# EAGLE board RGB_Fan_Controller_Rev_D (EAGLE 5.07)
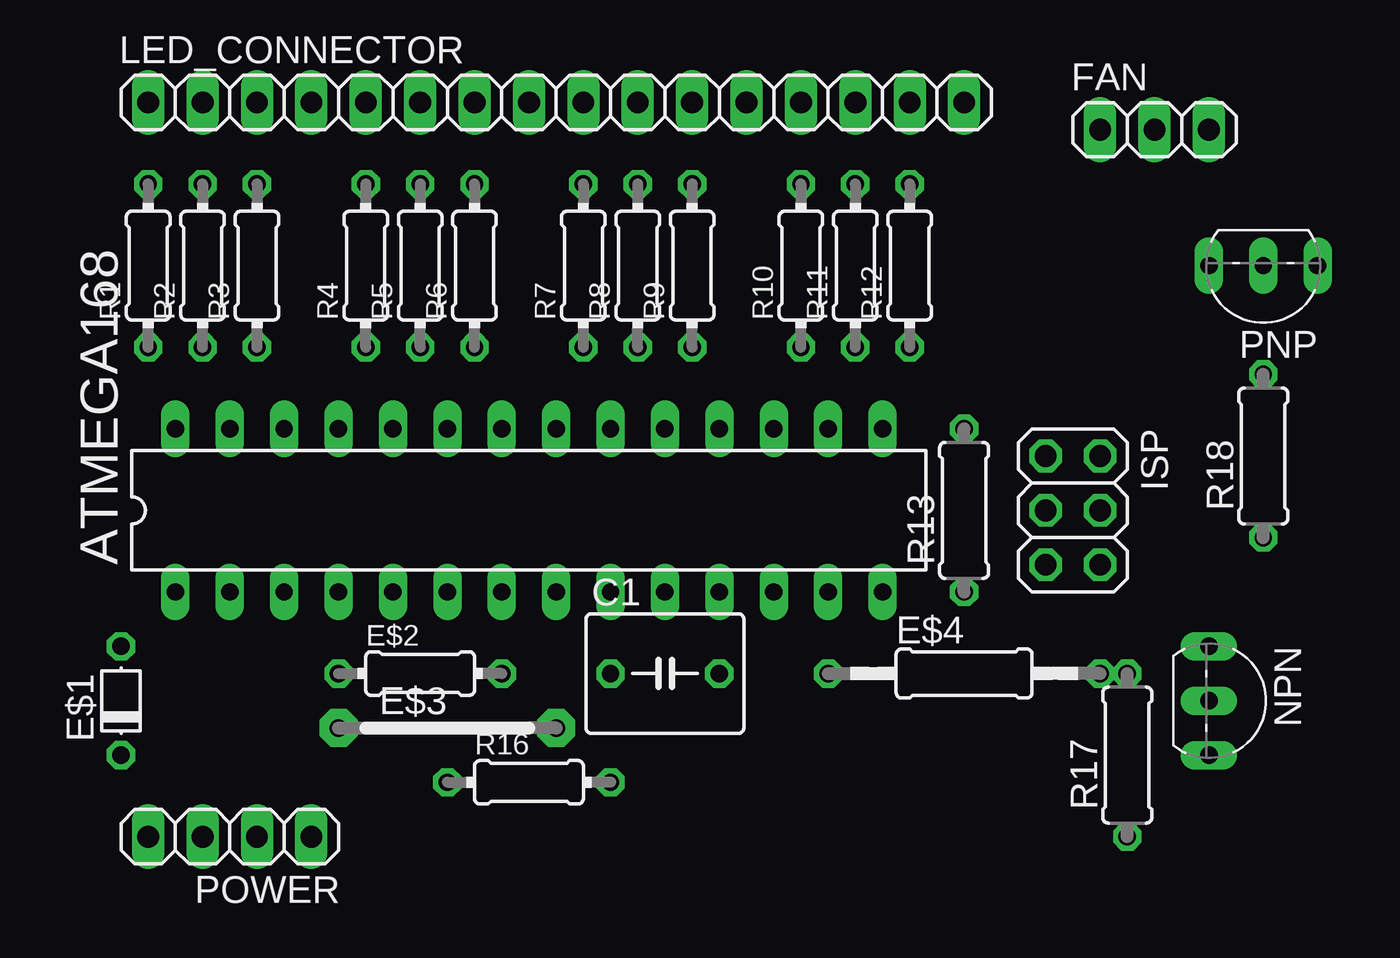
[diagram p0: board, top side]
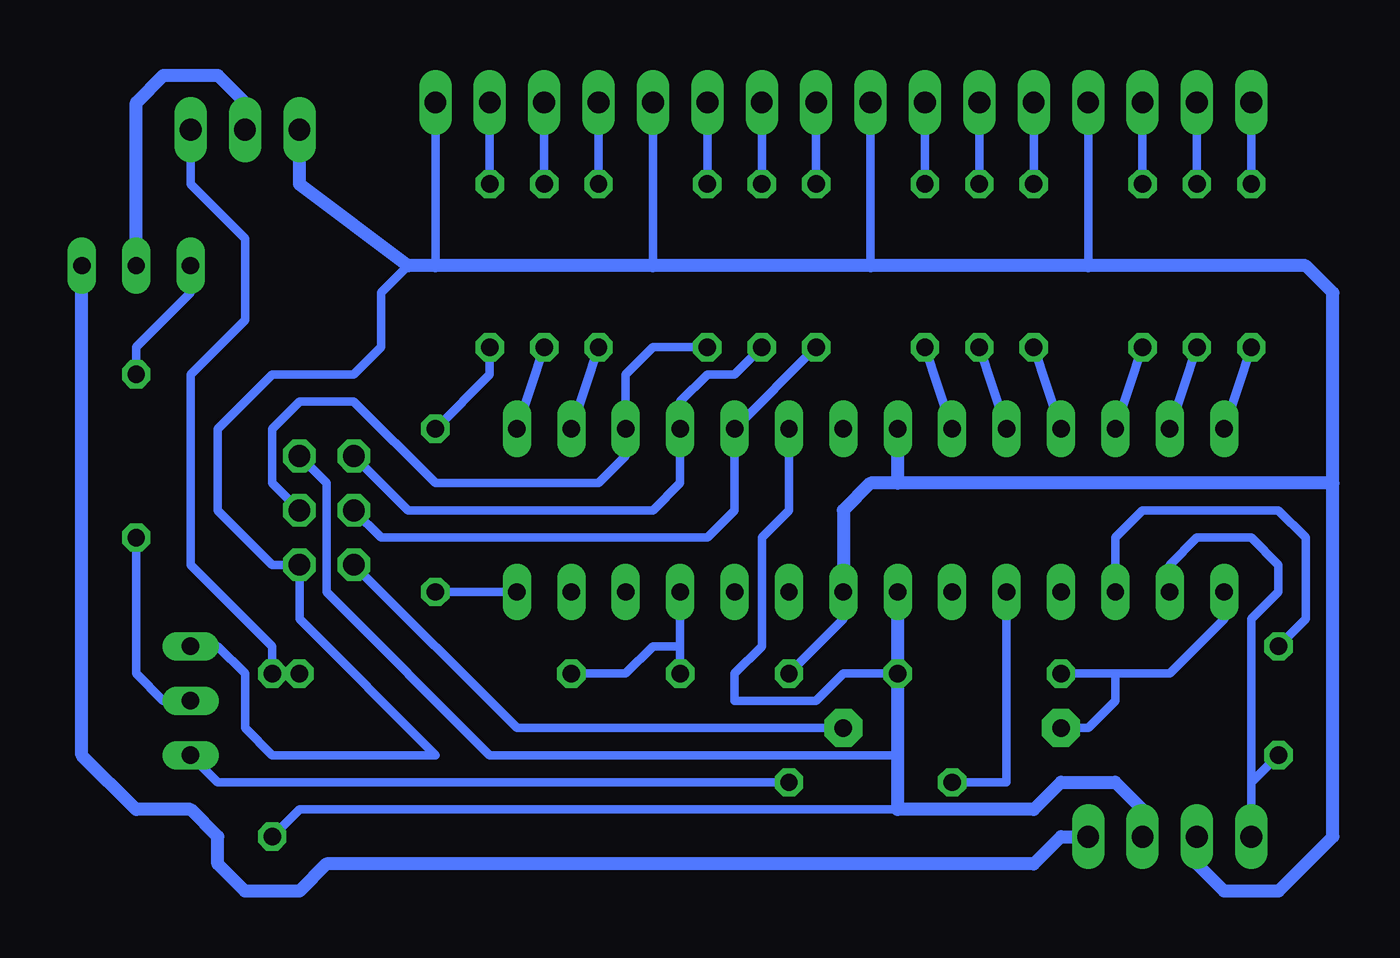
[diagram p1: board, bottom side, seen from below]

No outline drawn. Coordinates in mm, seen from the top.
Copper layers (1*16): Top 0.035mm / dielectric 1.5mm / Bottom 0.035mm
Design rules "default": minimum track width 10mil, minimum drill 24mil, track to track 8mil, track to pad 8mil, pad to pad 8mil, via to via 8mil, smd to smd 8mil, copper to edge 40mil, drill to drill 8mil, minimum pad ring 10mil, minimum via ring 8mil, stop-mask expansion 4mil, vias tented up to drill 0mil, thermal gap 10mil

## Footprints (pad centres in the part's own frame; a part is rotated, then mirrored left to right if it is on the bottom)
DIL28-3 = drill 0.813 long: 1 -16.51,-3.81; 2 -13.97,-3.81; 3 -11.43,-3.81; 4 -8.89,-3.81; 5 -6.35,-3.81; 6 -3.81,-3.81; 7 -1.27,-3.81; 8 1.27,-3.81; 9 3.81,-3.81; 10 6.35,-3.81; 11 8.89,-3.81; 12 11.43,-3.81; 13 13.97,-3.81; 14 16.51,-3.81; 15 16.51,3.81; 16 13.97,3.81; 17 11.43,3.81; 18 8.89,3.81; 19 6.35,3.81; 20 3.81,3.81; 21 1.27,3.81; 22 -1.27,3.81; 23 -3.81,3.81; 24 -6.35,3.81; 25 -8.89,3.81; 26 -11.43,3.81; 27 -13.97,3.81; 28 -16.51,3.81
C050-055X075 = drill 0.813 octagon: 1 -2.54,0; 2 2.54,0
D-5 = drill 0.813 octagon: A 2.54,0; C -2.54,0
0204/7 = drill 0.813 octagon: 1 -3.81,0; 2 3.81,0
10E = drill 0.813 pad 1.778 octagon: 1 -5.08,0; 2 5.08,0
0207/12 = drill 0.813 octagon: 1 -6.35,0; 2 6.35,0
1X03 = drill 1.016 long: 1 -2.54,0; 2 0,0; 3 2.54,0
2X03 = drill 1.016 octagon: 1 -2.54,-1.27; 2 -2.54,1.27; 3 0,-1.27; 4 0,1.27; 5 2.54,-1.27; 6 2.54,1.27
1X16 = drill 1.016 long: 1 -19.05,0; 2 -16.51,0; 3 -13.97,0; 4 -11.43,0; 5 -8.89,0; 6 -6.35,0; 7 -3.81,0; 8 -1.27,0; 9 1.27,0; 10 3.81,0; 11 6.35,0; 12 8.89,0; 13 11.43,0; 14 13.97,0; 15 16.51,0; 16 19.05,0
TO92-BEC = drill 0.813 long: B -2.54,0; C 2.54,0; E 0,0
1X04 = drill 1.016 long: 1 -3.81,0; 2 -1.27,0; 3 1.27,0; 4 3.81,0
0207/7 = drill 0.813 octagon: 1 -3.81,0; 2 3.81,0

## Placement (x,y rotation side)
ATMEGA168  [DIL28-3]  49.53,13.97 0 top
C1  [C050-055X075]  55.88,6.35 0 top
E$1  [D-5]  30.48,5.08 90 top
E$2  [0204/7]  44.45,6.35 0 top
E$3  [10E]  45.72,3.81 0 top
E$4  [0207/12]  69.85,6.35 0 top
FAN  [1X03]  78.74,31.75 0 top
ISP  [2X03]  74.93,13.97 270 top
LED_CONNECTOR  [1X16]  50.8,33.02 0 top
NPN  [TO92-BEC]  81.28,5.08 270 top
PNP  [TO92-BEC]  83.82,25.4 180 top
POWER  [1X04]  35.56,-1.27 180 top
R1  [0204/7]  31.75,25.4 90 top
R2  [0204/7]  34.29,25.4 90 top
R3  [0204/7]  36.83,25.4 90 top
R4  [0204/7]  41.91,25.4 90 top
R5  [0204/7]  44.45,25.4 90 top
R6  [0204/7]  46.99,25.4 90 top
R7  [0204/7]  52.07,25.4 90 top
R8  [0204/7]  54.61,25.4 90 top
R9  [0204/7]  57.15,25.4 90 top
R10  [0204/7]  62.23,25.4 90 top
R11  [0204/7]  64.77,25.4 90 top
R12  [0204/7]  67.31,25.4 90 top
R13  [0207/7]  69.85,13.97 90 top
R16  [0204/7]  49.53,1.27 0 top
R17  [0207/7]  77.47,2.54 90 top
R18  [0207/7]  83.82,16.51 90 top

## Library data of the parts
ATMEGA168 = atmel
C1 E$2 E$4 R1-R13 R16-R18 = resistor
E$1 = diode
E$3 = jumper
FAN ISP LED_CONNECTOR POWER = pinhead
NPN PNP = transistor

## Nets
POWER: ATMEGA168.8 ATMEGA168.22 FAN.1 ISP.6 NPN.B POWER.3
S$1: NPN.C R16.2
S$2: ATMEGA168.3
S$3: ATMEGA168.28 R1.1
S$4: ATMEGA168.27 R2.1
S$5: ATMEGA168.26 R3.1
S$6: ATMEGA168.25 R4.1
S$7: ATMEGA168.24 R5.1
S$8: ATMEGA168.23 R6.1
S$9: ATMEGA168.17 ISP.4 R9.1
S$10: ATMEGA168.1 E$3.1
S$11: ATMEGA168.19 ISP.3 R7.1
S$12: ATMEGA168.16 R10.1
S$13: ATMEGA168.15 R11.1
S$14: ATMEGA168.11
S$15: R3.2
S$16: R2.2
S$17: R1.2
S$18: R4.2
S$19: R5.2
S$20: R6.2
S$21: R7.2
S$22: R8.2
S$23: R9.2
S$24: R10.2
S$25: R11.2
S$26: R12.2
S$27: ATMEGA168.18 ISP.1 R8.1
S$28: E$3.2 ISP.5
S$29: ATMEGA168.20 ISP.2 POWER.2 R17.1
S$30: PNP.C R18.2
S$31: R12.1
S$34: ATMEGA168.14
S$35: PNP.B POWER.1
S$36: ATMEGA168.5 R16.1
S$37: ATMEGA168.2 POWER.4
S$38: E$4.2 FAN.3 R17.2
S$40: NPN.E
S$47: PNP.E

## Tracks (layer width: path | path; a pad name or v marks a point on that pad's centre or on a via)
POWER
  Bottom 0.406: 71.12,25.4 72.39,24.13 72.39,21.59 73.66,20.32 77.47,20.32 80.01,17.78 80.01,13.97 77.47,11.43 ISP.6 76.2,8.89 69.85,2.54 77.47,2.54 78.74,3.81 78.74,6.35 80.01,7.62 NPN.B | 69.85,25.4 69.85,34.29 | 59.69,25.4 59.69,34.29 | 53.34,6.35 50.8,8.89 ATMEGA168.8 | 49.53,25.4 49.53,34.29 | 39.37,25.4 39.37,34.29 | 34.29,-2.54 POWER.3
  Bottom 0.61: FAN.1 76.2,29.21 71.12,25.4 69.85,25.4 59.69,25.4 49.53,25.4 39.37,25.4 29.21,25.4 27.94,24.13 27.94,15.24 | ATMEGA168.8 50.8,13.97 49.53,15.24 48.26,15.24 | 48.26,15.24 ATMEGA168.22 | 27.94,15.24 48.26,15.24 | 34.29,-2.54 33.02,-3.81 30.48,-3.81 27.94,-1.27 27.94,15.24
S$1
  Bottom 0.406: R16.2 80.01,1.27 NPN.C
S$2
  Bottom 0.406: ATMEGA168.3 38.1,12.7 36.83,13.97 30.48,13.97 29.21,12.7 29.21,8.89 30.48,7.62
S$3
  Bottom 0.406: ATMEGA168.28 R1.1
S$4
  Bottom 0.406: ATMEGA168.27 R2.1
S$5
  Bottom 0.406: ATMEGA168.26 R3.1
S$6
  Bottom 0.406: ATMEGA168.25 R4.1
S$7
  Bottom 0.406: ATMEGA168.24 R5.1
S$8
  Bottom 0.406: ATMEGA168.23 R6.1
S$9
  Bottom 0.406: R9.1 59.69,21.59 60.96,20.32 ATMEGA168.17 60.96,16.51 62.23,15.24 69.85,15.24 73.66,19.05 76.2,19.05 77.47,17.78 77.47,15.24 ISP.4
S$10
  Bottom 0.406: E$3.1 39.37,3.81 38.1,5.08 38.1,6.35 | ATMEGA168.1 33.02,8.89 35.56,6.35 38.1,6.35 | 38.1,6.35 40.64,6.35
S$11
  Bottom 0.406: R7.1 ATMEGA168.19 55.88,13.97 57.15,12.7 72.39,12.7 ISP.3
S$12
  Bottom 0.406: ATMEGA168.16 R10.1
S$13
  Bottom 0.406: ATMEGA168.15 R11.1
S$14
  Bottom 0.406: 58.42,6.35 58.42,7.62 | 58.42,7.62 ATMEGA168.11 | 58.42,7.62 59.69,7.62 60.96,6.35 63.5,6.35
S$15
  Bottom 0.406: R3.2 36.83,34.29
S$16
  Bottom 0.406: R2.2 34.29,34.29
S$17
  Bottom 0.406: R1.2 31.75,34.29
S$18
  Bottom 0.406: R4.2 41.91,34.29
S$19
  Bottom 0.406: R5.2 44.45,34.29
S$20
  Bottom 0.406: R6.2 46.99,34.29
S$21
  Bottom 0.406: R7.2 52.07,34.29
S$22
  Bottom 0.406: R8.2 54.61,34.29
S$23
  Bottom 0.406: R9.2 57.15,34.29
S$24
  Bottom 0.406: R10.2 62.23,34.29
S$25
  Bottom 0.406: R11.2 64.77,34.29
S$26
  Bottom 0.406: R12.2 67.31,34.29
S$27
  Bottom 0.406: R8.1 55.88,20.32 57.15,20.32 58.42,19.05 ATMEGA168.18 58.42,15.24 59.69,13.97 71.12,13.97 ISP.1
S$28
  Bottom 0.406: ISP.5 66.04,3.81 E$3.2
S$29
  Bottom 0.406: ATMEGA168.20 53.34,13.97 54.61,12.7 54.61,7.62 55.88,6.35 55.88,5.08 52.07,5.08 50.8,6.35 48.26,6.35 | ISP.2 74.93,15.24 74.93,10.16 67.31,2.54 48.26,2.54 | R17.1 76.2,0 48.26,0
  Bottom 0.61: 48.26,10.16 48.26,6.35 48.26,2.54 48.26,0 41.91,0 40.64,1.27 38.1,1.27 36.83,0 POWER.2
S$30
  Bottom 0.406: PNP.C 81.28,24.13 83.82,21.59 R18.2
S$31
  Bottom 0.406: R12.1 67.31,20.32 69.85,17.78
S$34
  Bottom 0.406: ATMEGA168.14 69.85,10.16
S$35
  Bottom 0.61: PNP.B 86.36,2.54 83.82,0 81.28,0 80.01,-1.27 80.01,-2.54 78.74,-3.81 76.2,-3.81 74.93,-2.54 41.91,-2.54 40.64,-1.27 POWER.1
S$36
  Bottom 0.406: ATMEGA168.5 43.18,1.27 R16.1
S$37
  Bottom 0.406: ATMEGA168.2 35.56,11.43 34.29,12.7 31.75,12.7 30.48,11.43 30.48,10.16 31.75,8.89 31.75,1.27 | 31.75,1.27 POWER.4 | 31.75,1.27 30.48,2.54
S$38
  Bottom 0.406: FAN.3 81.28,29.21 78.74,26.67 78.74,22.86 81.28,20.32 81.28,11.43 77.47,7.62 R17.2 E$4.2
S$40
  Bottom 0.406: NPN.E 82.55,5.08 83.82,6.35 83.82,12.7
S$47
  Bottom 0.406: 78.74,31.75 78.74,33.02
  Bottom 0.61: PNP.E 83.82,33.02 82.55,34.29 80.01,34.29 78.74,33.02